# Altium PCB iris-fpc-set1.PcbDoc
Units mm, origin at the board's own origin, x right, y up, seen from the top; angles counter-clockwise.
Board outline 152.4 x 101.6 mm, 2 copper layers (Top Layer, Bottom Layer), stack 0.086 mm thick; 14 components, 46 nets, 124 pads, 0 vias.
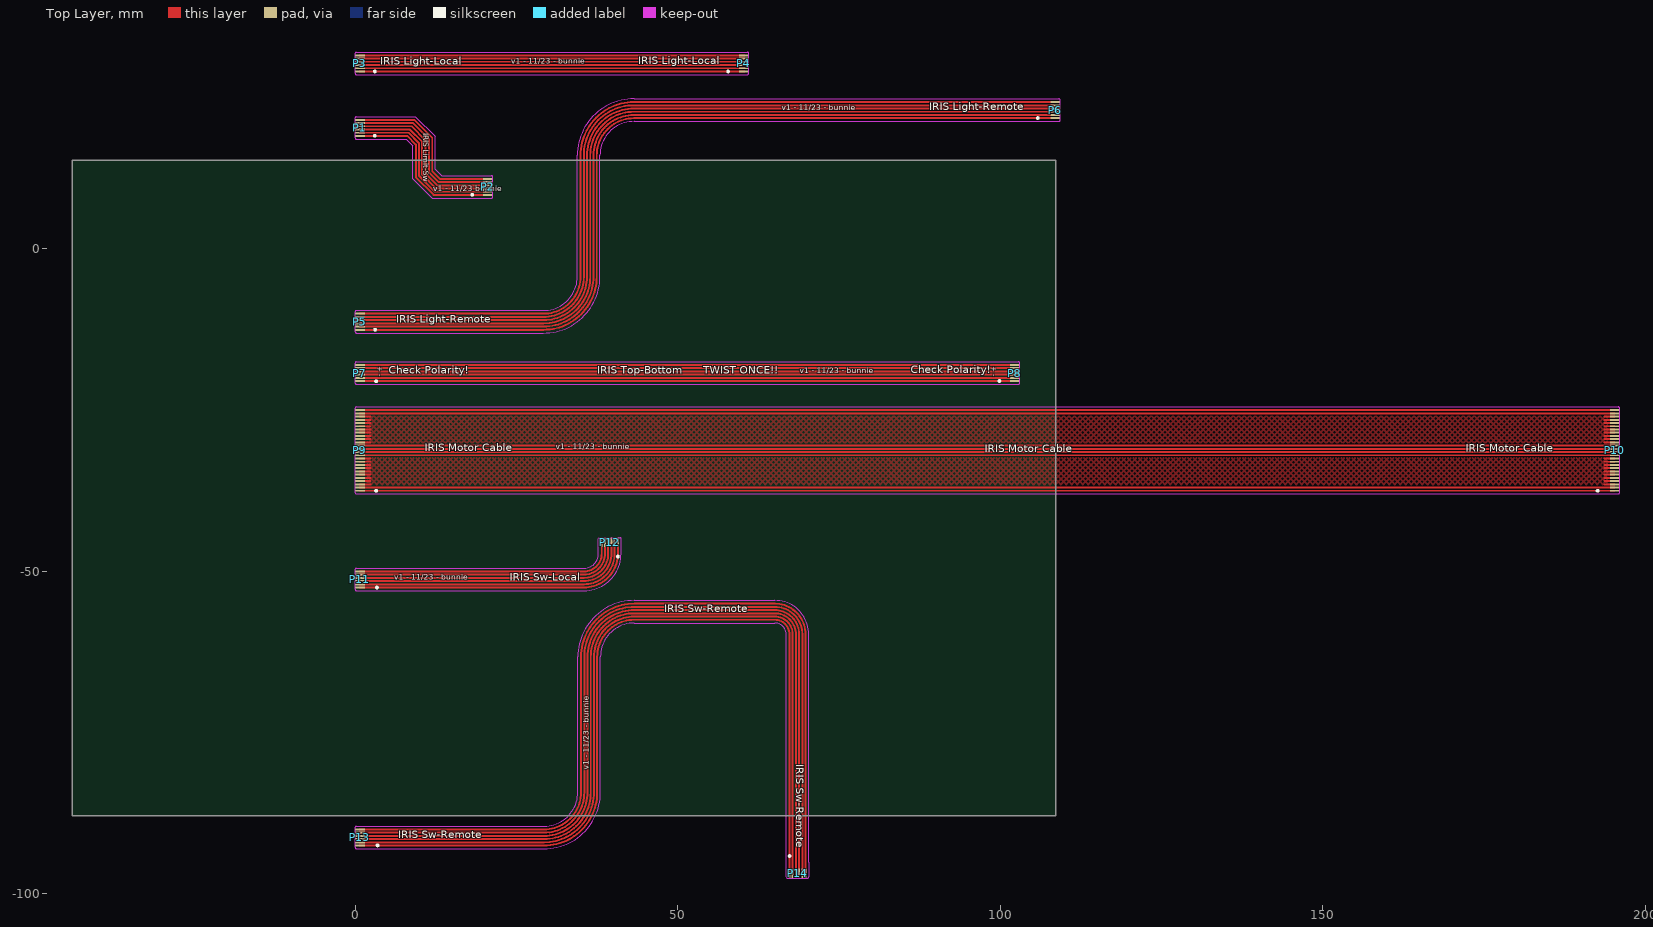
[diagram p0: Top Layer view]
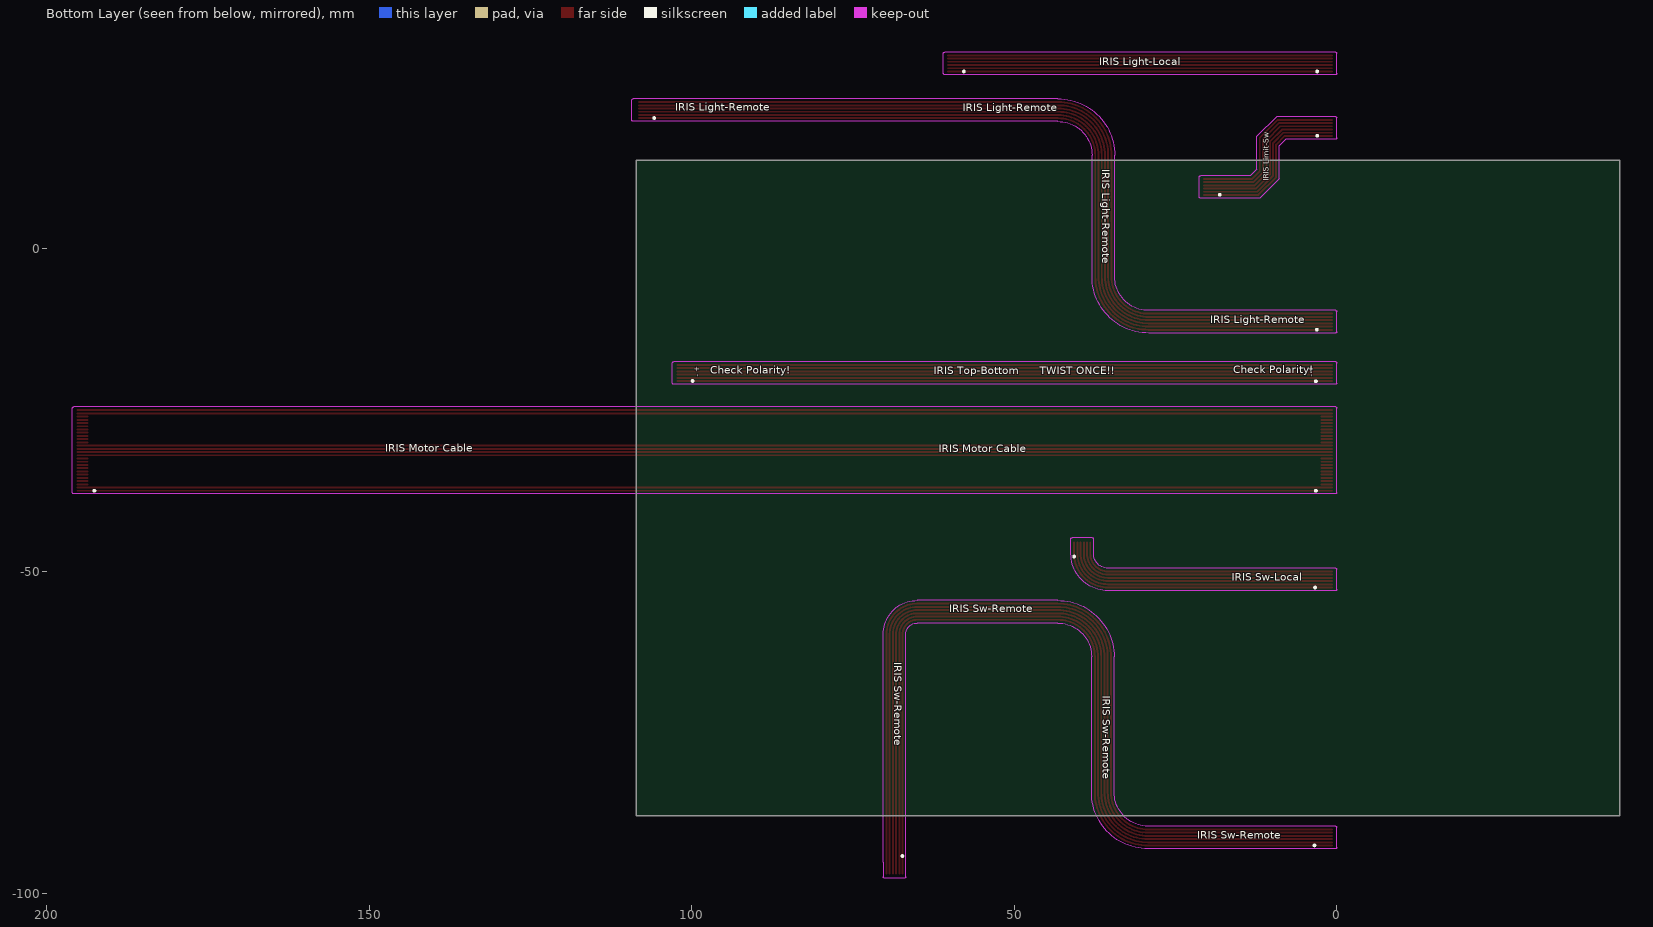
[diagram p1: Bottom Layer view, seen from below]

## Layer stack, top to bottom
Board Layer Stack Top Coverlay: solder mask 0.012, FC-001, Dk 4
Top Layer: signal copper 0.0356
Dielectric 1: dielectric 0.015, PI, Dk 4.8
Bottom Layer: signal copper 0.0356
Board Layer Stack Bottom Coverlay: solder mask 0.012, FC-001, Dk 4

## Board outline
-43.815,-87.884 108.585,-87.884 108.585,13.716 -43.815,13.716

## Design rules (kind name [scope] priority, off if disabled: settings)
Clearance [All] p1: gap=0.15 ignorepadtopadclearanceinfootprint=FALSE except(0: Arc-Hole Track-Hole SMDPad-Hole THPad-Hole Via-Hole Fill-Hole Poly-Hole Region-Hole Text-Hole)
PolygonConnect [All] p1: connectstyle=Relief reliefconductorwidth=0.254 reliefentries=4 polygonreliefangle="90 Angle" airgapwidth=0.254
RoutingVias [All] p1: holewidth=0.3 width=0.6 viastyle="Through Hole" minholewidth=0.3 minwidth=0.6 maxholewidth=0.3 maxwidth=0.6
SolderMaskExpansion [All] p1: expansion=0.102 istentingtop=FALSE
Width [All] p1: maxlimit=5 minlimit=0.15 preferedwidth=0.3
30 further rules are at their usual default settings.

## Components (designator, comment, footprint, x,y, rotation, side; value= is the part's Value field where it differs from the comment)
P1 "FH34 FPC end" FPC-06-0.5MMP-0.3T-2.5MMS 0,20 r90 top
P2 "FH34 FPC end" FPC-06-0.5MMP-0.3T-2.5MMS 21.325,8.35 r270 top
P3 "FH34 FPC end" FPC-06-0.5MMP-0.3T-2.5MMS 0,30 r90 top
P4 "FH34 FPC end" FPC-06-0.5MMP-0.3T-2.5MMS 61,27.5 r270 top
P5 "FH34 FPC end" FPC-06-0.5MMP-0.3T-2.5MMS 0,-10.05 r90 top
P6 "FH34 FPC end" FPC-06-0.5MMP-0.3T-2.5MMS 109.3,20.25 r270 top
P7 "FH34 FPC end" FPC-06-0.5MMP-0.3T-2.5MMS 0,-18 r90 top
P8 "FH34 FPC end" FPC-06-0.5MMP-0.3T-2.5MMS 103,-20.5 r270 top
P9 "26-pin FPC" FPC-26-0.5MMP-0.3T-2.5MMS 0,-25 r90 top
P10 "26-pin FPC" FPC-26-0.5MMP-0.3T-2.5MMS 196,-37.5 r270 top
P11 "FH34 FPC end" FPC-06-0.5MMP-0.3T-2.5MMS 0,-50 r90 top
P12 "FH34 FPC end" FPC-06-0.5MMP-0.3T-2.5MMS 40.725,-44.75 r0 top
P13 "FH34 FPC end" FPC-06-0.5MMP-0.3T-2.5MMS 0,-90 r90 top
P14 "FH34 FPC end" FPC-06-0.5MMP-0.3T-2.5MMS 67.325,-97.55 r180 top

## Footprints (in the part's own frame and the unit in brackets; to place one, negate y for a bottom-side part, rotate by r counter-clockwise, add the part's x,y. Pads: shape width x height; smd on the part's side, far side on the other; paste and mask are expansions set on the pad)
FPC-06-0.5MMP-0.3T-2.5MMS [mm] "FPC connector, 6 contact 0.5mm pitch, 0.3mm thick with 2.5mm stiffener (FH34)"
  rect 0.3x1.5 smd mask+0: 1(0,-0.75) 2(-0.5,-0.75) 3(-1,-0.75) 4(-1.5,-0.75) 5(-2,-0.75) 6(-2.5,-0.75)
  Keep-Out Layer lines w0.1: -3,-2.5 -3,-0.2 cw(c-2.8,-0.2) -2.8,0 0.3,0 cw(c0.3,-0.2) 0.5,-0.2 0.5,-2.5
FPC-26-0.5MMP-0.3T-2.5MMS [mm] "FPC connector, 26 contact 0.5mm pitch, 0.3mm thick with 2.5mm stiffener (FH34)"
  rect 0.3x1.5 smd mask+0: 1(0,-0.75) 2(-0.5,-0.75) 3(-1,-0.75) 4(-1.5,-0.75) 5(-2,-0.75) 6(-2.5,-0.75) 7(-3,-0.75) 8(-3.5,-0.75) 9(-4,-0.75) 10(-4.5,-0.75) 11(-5,-0.75) 12(-5.5,-0.75) 13(-6,-0.75) 14(-6.5,-0.75) 15(-7,-0.75) 16(-7.5,-0.75) 17(-8,-0.75) 18(-8.5,-0.75) 19(-9,-0.75) 20(-9.5,-0.75) 21(-10,-0.75) 22(-10.5,-0.75) 23(-11,-0.75) 24(-11.5,-0.75) 25(-12,-0.75) 26(-12.5,-0.75)
  Keep-Out Layer lines w0.1: -13,-2.5 -13,-0.2 cw(c-12.8,-0.2) -12.8,0 0.3,0 cw(c0.3,-0.2) 0.5,-0.2 0.5,-2.5

## Part data
P1 P2 P3 P4 P5 P6 P7 P8 P11 P12 P13 P14: library part "Header 6", "Header, 6-Pin", MPN=FH34SRJ-6S-0.5SH(50), LatestRevisionDate=17-Jul-2002, LatestRevisionNote="Re-released for DXP Platform.", MYPN=J-FH34SRJ-6S-0.5SH(50), Publisher="Altium Limited", VENDOR=HRS
P9 P10: library part FPC-26, "26 Pin FPC header", MPN=FH34SRJ-26S-0.5SH(99), MYPN=J-FPC-0.5mm-26-0.3mm-T/B, System=Connector, VENDOR=Hirose

## Nets (pads, with @x,y where several pads share a name; then routed paths per layer and width w, separated by ;. In a path a pad name is that pad's centre, name@x,y a point inside that pad or via, vN(x,y) a via of type N, cw(c..) or ccw(c..) an arc to the next point about the centre after c; other vN are vias at no path point)
light-local0: P3.6 P4.1 | length 59.5
  Top Layer w0.3: P3.6 P4.1
light-local1: P3.5 P4.2 | length 59.5
  Top Layer w0.3: P3.5 P4.2
light-local2: P3.4 P4.3 | length 59.5
  Top Layer w0.3: P3.4 P4.3
light-local3: P3.3 P4.4 | length 59.5
  Top Layer w0.3: P3.3 P4.4
light-local4: P3.2 P4.5 | length 59.5
  Top Layer w0.3: P3.2 P4.5
light-local5: P3.1 P4.6 | length 59.5
  Top Layer w0.3: P3.1 P4.6
light-remote0: P5.6 P6.1 | length 134.2
  Top Layer w0.3: P5.6 29.2,-12.55 ccw(c29.2,-4.3) 37.45,-4.3 37.45,14.5 cw(c43.2,14.5) 43.2,20.25 P6.1@108.2,20.25
light-remote1: P5.5 P6.2 | length 134.2
  Top Layer w0.3: P5.5 29.2,-12.05 ccw(c29.2,-4.3) 36.95,-4.3 36.95,14.5 cw(c43.2,14.5) 43.2,20.75 P6.2@108.2,20.75
light-remote2: P5.4 P6.3 | length 134.2
  Top Layer w0.3: P5.4 29.2,-11.55 ccw(c29.2,-4.3) 36.45,-4.3 36.45,14.5 cw(c43.2,14.5) 43.2,21.25 P6.3@108.2,21.25
light-remote3: P5.3 P6.4 | length 134.2
  Top Layer w0.3: P5.3 29.2,-11.05 ccw(c29.2,-4.3) 35.95,-4.3 35.95,14.5 cw(c43.2,14.5) 43.2,21.75 P6.4@108.2,21.75
light-remote4: P5.2 P6.5 | length 134.2
  Top Layer w0.3: P5.2 29.2,-10.55 ccw(c29.2,-4.3) 35.45,-4.3 35.45,14.5 cw(c43.2,14.5) 43.2,22.25 P6.5@108.2,22.25
light-remote5: P5.1 P6.6 | length 134.2
  Top Layer w0.3: P5.1 29.2,-10.05 ccw(c29.2,-4.3) 34.95,-4.3 34.95,14.5 cw(c43.2,14.5) 43.2,22.75 P6.6@108.2,22.75
limitsw0: P1.6 P2.1 | length 26.6
  Top Layer w0.3: P1.6 8.075,17.5 9.425,16.15 9.425,11.075 12.15,8.35 P2.1
limitsw1: P1.5 P2.2 | length 26.6
  Top Layer w0.3: P1.5 8.275,18 9.9,16.375 9.9,11.3 12.35,8.85 P2.2
limitsw2: P1.4 P2.3 | length 26.6
  Top Layer w0.3: P1.4 8.5,18.5 10.375,16.625 10.375,11.525 12.55,9.35 P2.3
limitsw3: P1.3 P2.4 | length 26.6
  Top Layer w0.3: P1.3 8.75,19 10.9,16.85 10.9,11.7 12.75,9.85 P2.4
limitsw4: P1.2 P2.5 | length 26.6
  Top Layer w0.3: P1.2 8.975,19.5 11.425,17.05 11.425,11.875 12.95,10.35 P2.5
limitsw5: P1.1 P2.6 | length 26.7
  Top Layer w0.3: P1.1 9.2,20 11.95,17.25 11.95,12.05 13.15,10.85 P2.6
m1_0: P9.26 P10.1 | length 194.5
  Top Layer w0.3: P9.26 192.975,-37.5 194.112,-37.5 P10.1
m1_1: P9.25 P10.2 | length 195.6
  Top Layer w0.3: P9.25 194.112,-37 ; 192.975,-37 P10.2
m1_2: P9.15 P10.12 | length 194.5
  Top Layer w0.3: P9.15 192.975,-32 194.112,-32 P10.12
m1_3: P9.14 P10.13 | length 194.5
  Top Layer w0.3: P9.14 192.975,-31.5 194.112,-31.5 P10.13
m1_4: P9.13 P10.14 | length 194.5
  Top Layer w0.3: P9.13 192.975,-31 194.112,-31 P10.14
m1_5: P9.12 P10.15 | length 195.6
  Top Layer w0.3: P9.12 192.975,-30.5 ; 194.112,-30.5 192.975,-30.5 ; P10.15 192.975,-30.5
m1_6: P9.2 P10.25 | length 195.6
  Top Layer w0.3: P9.2 194.112,-25.5 ; 192.975,-25.5 P10.25
m1_7: P9.1 P10.26 | length 194.5
  Top Layer w0.3: P9.1 192.975,-25 194.112,-25 P10.26
m1_tie0: P9.16 P9.17 P9.18 P9.19 P9.20 P9.21 P9.22 P9.23 P9.24 P10.3 P10.4 P10.5 P10.6 P10.7 P10.8 P10.9 P10.10 P10.11 | length 28.8
  Top Layer w0.3: P9.24 2.35,-36.5 ; P9.23 2.35,-36 ; P9.22 2.35,-35.5 ; P9.21 2.35,-35 ; P9.20 2.35,-34.5 ; P9.19 2.35,-34 ; P9.18 2.35,-33.5 ; P9.17 2.35,-33 ; P9.16 2.35,-32.5 ; 193.65,-36.5 P10.3 ; 193.65,-36 P10.4 ; 193.65,-35.5 P10.5 ; 193.65,-35 P10.6 ; 193.65,-34.5 P10.7 ; 193.65,-34 P10.8 ; 193.65,-33.5 P10.9 ; 193.65,-33 P10.10 ; 193.65,-32.5 P10.11
m1_tie1: P9.3 P9.4 P9.5 P9.6 P9.7 P9.8 P9.9 P9.10 P9.11 P10.16 P10.17 P10.18 P10.19 P10.20 P10.21 P10.22 P10.23 P10.24 | length 28.8
  Top Layer w0.3: P9.11 2.35,-30 ; P9.10 2.35,-29.5 ; P9.9 2.35,-29 ; P9.8 2.35,-28.5 ; P9.7 2.35,-28 ; P9.6 2.35,-27.5 ; P9.5 2.35,-27 ; P9.4 2.35,-26.5 ; P9.3 2.35,-26 ; 193.65,-30 P10.16 ; 193.65,-29.5 P10.17 ; 193.65,-29 P10.18 ; 193.65,-28.5 P10.19 ; 193.65,-28 P10.20 ; 193.65,-27.5 P10.21 ; 193.65,-27 P10.22 ; 193.65,-26.5 P10.23 ; 193.65,-26 P10.24
sw-local0: P11.6 P12.1 | length 44.7
  Top Layer w0.3: P11.6 35.475,-52.5 ccw(c35.475,-47.25) 40.725,-47.25 P12.1
sw-local1: P11.5 P12.2 | length 43.9
  Top Layer w0.3: P11.5 35.475,-52 ccw(c35.475,-47.25) 40.225,-47.25 P12.2
sw-local2: P11.4 P12.3 | length 43.2
  Top Layer w0.3: P11.4 35.475,-51.5 ccw(c35.475,-47.25) 39.725,-47.25 P12.3
sw-local3: P11.3 P12.4 | length 42.4
  Top Layer w0.3: P11.3 35.475,-51 ccw(c35.475,-47.25) 39.225,-47.25 P12.4
sw-local4: P11.2 P12.5 | length 41.6
  Top Layer w0.3: P11.2 35.475,-50.5 ccw(c35.475,-47.25) 38.725,-47.25 P12.5
sw-local5: P11.1 P12.6 | length 40.8
  Top Layer w0.3: P11.1 35.475,-50 ccw(c35.475,-47.25) 38.225,-47.25 P12.6
sw-remote0: P13.6 P14.1 | length 133.9
  Top Layer w0.3: P13.6 29.275,-92.5 ccw(c29.275,-84.25) 37.525,-84.25 37.525,-63.25 cw(c43.275,-63.25) 43.275,-57.5 65.075,-57.5 cw(c65.075,-59.75) 67.325,-59.75 P14.1
sw-remote1: P13.5 P14.2 | length 134.7
  Top Layer w0.3: P13.5 29.275,-92 ccw(c29.275,-84.25) 37.025,-84.25 37.025,-63.25 cw(c43.275,-63.25) 43.275,-57 65.075,-57 cw(c65.075,-59.75) 67.825,-59.75 P14.2
sw-remote2: P13.4 P14.3 | length 135.5
  Top Layer w0.3: P13.4 29.275,-91.5 ccw(c29.275,-84.25) 36.525,-84.25 36.525,-63.25 cw(c43.275,-63.25) 43.275,-56.5 65.075,-56.5 cw(c65.075,-59.75) 68.325,-59.75 P14.3
sw-remote3: P13.3 P14.4 | length 136.3
  Top Layer w0.3: P13.3 29.275,-91 ccw(c29.275,-84.25) 36.025,-84.25 36.025,-63.25 cw(c43.275,-63.25) 43.275,-56 65.075,-56 cw(c65.075,-59.75) 68.825,-59.75 P14.4
sw-remote4: P13.2 P14.5 | length 137
  Top Layer w0.3: P13.2 29.275,-90.5 ccw(c29.275,-84.25) 35.525,-84.25 35.525,-63.25 cw(c43.275,-63.25) 43.275,-55.5 65.075,-55.5 cw(c65.075,-59.75) 69.325,-59.75 P14.5
sw-remote5: P13.1 P14.6 | length 137.8
  Top Layer w0.3: P13.1 29.275,-90 ccw(c29.275,-84.25) 35.025,-84.25 35.025,-63.25 cw(c43.275,-63.25) 43.275,-55 65.075,-55 cw(c65.075,-59.75) 69.825,-59.75 P14.6
top-bot0: P7.6 P8.1 | length 101.5
  Top Layer w0.3: P7.6 P8.1
top-bot1: P7.5 P8.2 | length 101.5
  Top Layer w0.3: P7.5 P8.2
top-bot2: P7.4 P8.3 | length 101.5
  Top Layer w0.3: P7.4 P8.3
top-bot3: P7.3 P8.4 | length 101.5
  Top Layer w0.3: P7.3 P8.4
top-bot4: P7.2 P8.5 | length 101.5
  Top Layer w0.3: P7.2 P8.5
top-bot5: P7.1 P8.6 | length 101.5
  Top Layer w0.3: P7.1 P8.6

## Polygon pours and split planes (outlines as drawn)
m1_tie1 on Top Layer "M1_TIE1_L01_P001" (hatched 45Degree grid 0.6 track 0.3, remove dead copper, pour order 1): 1.875,-30.725 1.875,-24.475 194.4,-24.475 194.4,-30.65
m1_tie0 on Top Layer "M1_TIE0_L01_P000" (hatched 45Degree grid 0.6 track 0.3, remove dead copper, pour order 0): 1.875,-38 1.875,-31.75 194.4,-31.75 194.4,-37.925

## Keep-outs
Keep-Out Layer:
  lines w0.1: 2.5,-93 29.275,-93 ccw(c29.275,-84.25) 38.025,-84.25 38.025,-63.25 cw(c43.275,-63.25) 43.275,-58 65.075,-58 cw(c65.075,-59.75) 66.825,-59.75 66.825,-95.05 ; 2.5,-89.5 29.275,-89.5 ccw(c29.275,-84.25) 34.525,-84.25 34.525,-63.25 cw(c43.275,-63.25) 43.275,-54.5 65.075,-54.5 cw(c65.075,-59.75) 70.325,-59.75 70.325,-95.05 ; 2.5,-53 35.475,-53 ccw(c35.475,-47.25) 41.225,-47.25 ; 2.5,-49.5 35.475,-49.5 ccw(c35.475,-47.25) 37.725,-47.25 ; 2.5,-38 193.5,-38 ; 2.5,-24.5 193.5,-24.5 ; 2.5,-21 100.5,-21 ; 2.5,-17.5 100.5,-17.5 ; 2.5,-13.05 29.15,-13.05 ccw(c29.2,-4.3) 37.95,-4.3 37.95,14.5 cw(c43.2,14.5) 43.25,19.75 106.8,19.75 ; 2.5,-9.55 29.15,-9.55 ccw(c29.2,-4.3) 34.45,-4.3 34.45,14.5 ; 2.5,17 7.9,17 8.9,16 8.9,10.875 11.925,7.85 18.825,7.85 ; 2.5,20.5 9.35,20.5 12.4,17.45 12.4,12.344 ; 2.5,27 58.5,27 ; 2.5,30.5 58.5,30.5 ; 12.398,12.35 13.398,11.35 18.825,11.35 ; 106.8,23.25 43.25,23.25 ccw(c43.2,14.5) 34.45,14.5 ; 34.45,14.5 34.45,14.5

## Silkscreen, mask and mechanical layers (free items; w line width, h text height)
Top Overlay:
  circle w0.3: c67.35,-94.125 r0.141
  circle w0.3: c3.475,-92.475 r0.141
  circle w0.3: c40.725,-47.7 r0.141
  circle w0.3: c3.375,-52.5 r0.141
  circle w0.3: c192.6,-37.5 r0.141
  circle w0.3: c3.25,-37.5 r0.141
  circle w0.3: c99.875,-20.475 r0.141
  circle w0.3: c3.25,-20.525 r0.141
  circle w0.3: c105.825,20.275 r0.141
  circle w0.3: c3.1,-12.525 r0.141
  circle w0.3: c18.15,8.375 r0.141
  circle w0.3: c3.025,17.525 r0.141
  circle w0.3: c57.825,27.5 r0.141
  circle w0.3: c3.05,27.5 r0.141
  text "v1 - 11/23 - bunnie" at 24.175,28.42 h1.5
  text "IRIS Light-Local" at 43.9,28.211 h2
  text "IRIS Light-Local" at 3.875,28.161 h2
  text "v1 - 11/23 - bunnie" at 66.125,21.17 h1.5
  text "IRIS Light-Remote" at 89.025,21.136 h2
  text "IRIS Limit-Sw" at 10.214,17.9 h1.5 r270
  text "v1 - 11/23 bunnie" at 12.075,8.625 h1.5
  text "IRIS Light-Remote" at 6.35,-11.839 h2
  text "+ -" at 3.475,-18.175 h0.8 r270
  text "+ -" at 98.7,-18.175 h0.8 r270
  text "v1 - 11/23 - bunnie" at 68.9,-19.63 h1.5
  text "Check Polarity!" at 86.101,-19.688 h2
  text "Check Polarity!" at 5.201,-19.738 h2
  text "IRIS Top-Bottom      TWIST ONCE!!" at 37.5,-19.757 h2
  text "v1 - 11/23 - bunnie" at 31.075,-31.405 h1.5
  text "IRIS Motor Cable" at 10.825,-31.781 h2
  text "IRIS Motor Cable" at 172.125,-31.806 h2
  text "IRIS Motor Cable" at 97.575,-31.906 h2
  text "v1 - 11/23 - bunnie" at 6.05,-51.63 h1.5
  text "IRIS Sw-Local" at 23.975,-51.832 h2
  text "IRIS Sw-Remote" at 47.925,-56.731 h2
  text "IRIS Sw-Remote" at 67.994,-79.9 h2 r270
  text "v1 - 11/23 - bunnie" at 36.505,-80.725 h1.5 r90
  text "IRIS Sw-Remote" at 6.675,-91.756 h2
Bottom Overlay:
  circle w0.3: c67.35,-94.125 r0.141
  circle w0.3: c3.475,-92.475 r0.141
  circle w0.3: c40.725,-47.7 r0.141
  circle w0.3: c3.375,-52.5 r0.141
  circle w0.3: c192.6,-37.5 r0.141
  circle w0.3: c3.25,-37.5 r0.141
  circle w0.3: c99.875,-20.475 r0.141
  circle w0.3: c3.25,-20.525 r0.141
  circle w0.3: c105.825,20.275 r0.141
  circle w0.3: c3.1,-12.525 r0.141
  circle w0.3: c18.15,8.375 r0.141
  circle w0.3: c3.025,17.525 r0.141
  circle w0.3: c57.825,27.5 r0.141
  circle w0.3: c3.05,27.5 r0.141
  text "IRIS Light-Local" at 36.85,28.111 h2
  text "IRIS Light-Remote" at 102.55,21.036 h2
  text "IRIS Light-Remote" at 58.025,20.911 h2
  text "IRIS Light-Remote" at 36.789,12.375 h2 r90
  text "IRIS Limit-Sw" at 10.264,10.525 h1.5 r270
  text "IRIS Light-Remote" at 19.65,-11.914 h2
  text "+ -" at 3.625,-18.175 h0.8 r270
  text "+ -" at 98.85,-18.175 h0.8 r270
  text "Check Polarity!" at 16.024,-19.688 h2
  text "Check Polarity!" at 97.124,-19.738 h2
  text "IRIS Top-Bottom      TWIST ONCE!!" at 62.5,-19.832 h2
  text "IRIS Motor Cable" at 147.55,-31.806 h2
  text "IRIS Motor Cable" at 61.725,-31.906 h2
  text "IRIS Sw-Local" at 16.275,-51.832 h2
  text "IRIS Sw-Remote" at 60.1,-56.756 h2
  text "IRIS Sw-Remote" at 69.006,-64.1 h2 r90
  text "IRIS Sw-Remote" at 36.706,-69.275 h2 r90
  text "IRIS Sw-Remote" at 21.65,-91.831 h2
Mechanical 2:
  lines w0.381: 73.365,-6.937 83.777,-6.937 136.086,-6.937 150.306,-6.937 166.812,-6.937 181.286,-6.937 ; 73.365,-3.889 83.777,-3.889 136.086,-3.889 150.306,-3.889 166.812,-3.889 181.286,-3.889 ; 73.365,-0.841 83.777,-0.841 136.086,-0.841 150.306,-0.841 166.812,-0.841 181.286,-0.841 ; 73.365,2.207 83.777,2.207 136.086,2.207 150.306,2.207 166.812,2.207 181.286,2.207 ; 73.365,5.255 83.777,5.255 136.086,5.255 150.306,5.255 166.812,5.255 181.286,5.255 ; 73.365,8.303 83.777,8.303 136.086,8.303 150.306,8.303 166.812,8.303 181.286,8.303 ; 73.365,11.351 181.286,11.351 ; 83.777,14.399 83.777,-9.985 ; 136.086,14.399 136.086,-9.985 ; 150.306,14.399 150.306,-9.985 ; 166.812,14.399 166.812,-9.985 ; 83.777,-9.985 136.086,-9.985 ; 83.777,-9.985 73.365,-9.985 73.365,14.399 181.286,14.399 181.286,-9.985 166.812,-9.985 ; 136.086,-9.985 150.306,-9.985 ; 150.306,-9.985 166.812,-9.985
  text "OK to substitute for standard 1-sided FPC stack with stiffener" at 93,15.675 h1.5
  text "Layer" at 75.143,12.113 h1.52
  text "Name" at 85.555,12.113 h1.52
  text "Material" at 137.864,12.113 h1.52
  text "Thickness" at 152.084,12.113 h1.52
  text "Constant" at 168.59,12.113 h1.52
  text "Top Overlay" at 85.555,9.065 h1.52
  text "Board Layer Stack Top Coverlay" at 85.555,6.017 h1.52
  text "FC-001" at 137.864,6.017 h1.52
  text "0.012mm" at 152.084,6.017 h1.52
  text "4" at 168.59,6.017 h1.52
  text "1" at 75.143,2.969 h1.52
  text "Top Layer" at 85.555,2.969 h1.52
  text "0.036mm" at 152.084,2.969 h1.52
  text "Dielectric 1" at 85.555,-0.079 h1.52
  text "PI" at 137.864,-0.079 h1.52
  text "0.015mm" at 152.084,-0.079 h1.52
  text "4.8" at 168.59,-0.079 h1.52
  text "2" at 75.143,-3.127 h1.52
  text "Bottom Layer" at 85.555,-3.127 h1.52
  text "0.036mm" at 152.084,-3.127 h1.52
  text "Board Layer Stack Bottom Coverlay" at 85.555,-6.175 h1.52
  text "FC-001" at 137.864,-6.175 h1.52
  text "0.012mm" at 152.084,-6.175 h1.52
  text "4" at 168.59,-6.175 h1.52
  text "Bottom Overlay" at 85.555,-9.223 h1.52
  text "Total board thickness:" at 75.143,-12.271 h1.52
  text "0.110mm" at 152.084,-12.271 h1.52
  text "(non-stiffener area)" at 110.35,-12.4 h1.5
  text "Please panelize boards to optimize cost" at 75.375,-15 h1.5
Mechanical 4:
  lines w0.1: -0.025,-91.25 29.275,-91.25 ccw(c29.275,-84.25) 36.275,-84.25 36.275,-63.25 cw(c43.275,-63.25) 43.275,-56.25 65.075,-56.25 cw(c65.075,-59.75) 68.575,-59.75 68.575,-97.55 ; -0.025,-51.25 35.475,-51.25 ccw(c35.475,-47.25) 39.475,-47.25 39.475,-44.75 ; -0.025,18.75 10.65,18.75 10.65,9.6 21.325,9.6 ; 0,-11.3 29.2,-11.3 ccw(c29.2,-4.3) 36.2,-4.3 36.2,14.5 ; 8.413,16.513 10.887,18.987 ; 8.9,13.825 12.4,13.825 ; 10.413,9.363 12.887,11.837 ; 27.5,-84.25 31.3,-84.25 ; 27.8,-4.3 36.8,-4.3 ; 29.2,-10.7 29.2,-3.7 ; 29.275,-91.4 29.275,-82.975 ; 35.075,-47.25 35.975,-47.25 ; 35.475,-49.3 35.475,-46.85 ; 36.125,-63.25 44.275,-63.25 ; 43.2,13 43.2,21.35 ; 43.275,-63.575 43.275,-56.1 ; 44.15,14.5 36.2,14.5 ; 58.3,21.9 58.3,23.3 ; 65.075,-60.475 65.075,-56.1 ; 109.3,21.5 58.3,21.5 43.2,21.5 ccw(c43.2,14.5) 36.2,14.5
  text "bend point" at 56.8,24.467 h0.5

## Dimensions
68.575,-59.75 to 68.575,-97.55 on Mechanical 4
43.275,-56.25 to 65.075,-56.25 on Mechanical 4
36.275,-84.25 to 36.275,-63.25 on Mechanical 4
-0.025,-91.25 to 29.275,-91.25 on Mechanical 4
-0.025,-51.25 to 35.475,-49.3 on Mechanical 4
0,-24.7 to 196,-24.7 on Mechanical 4
36.2,14.5 to 43.2,21.5 on Mechanical 4
29.2,-11.3 to 36.2,-4.3 on Mechanical 4
43.2,21.5 to 58.3,21.5 on Mechanical 4
36.2,-4.3 to 36.2,14.5 on Mechanical 4
0,-11.3 to 29.2,-11.3 on Mechanical 4
58.3,21.9 to 109.3,21.5 on Mechanical 4
10.65,9.6 to 10.65,18.75 on Mechanical 4
10.65,18.75 to -0.025,18.75 on Mechanical 4

## Text inside footprints (layer, text, board x,y; h text height)
P1: Mechanical 2 "PI stiffiner to 0.3mm  / +/-0.03mm total thickness / without coverlay" at -1.15,15.6 h0.25 r90
P2: Mechanical 2 "PI stiffiner to 0.3mm  / +/-0.03mm total thickness / without coverlay" at 22.475,12.75 h0.25 r270
P3: Mechanical 2 "PI stiffiner to 0.3mm  / +/-0.03mm total thickness / without coverlay" at -1.15,25.6 h0.25 r90
P4: Mechanical 2 "PI stiffiner to 0.3mm  / +/-0.03mm total thickness / without coverlay" at 62.15,31.9 h0.25 r270
P5: Mechanical 2 "PI stiffiner to 0.3mm  / +/-0.03mm total thickness / without coverlay" at -1.15,-14.45 h0.25 r90
P6: Mechanical 2 "PI stiffiner to 0.3mm  / +/-0.03mm total thickness / without coverlay" at 110.45,24.65 h0.25 r270
P7: Mechanical 2 "PI stiffiner to 0.3mm  / +/-0.03mm total thickness / without coverlay" at -1.15,-22.4 h0.25 r90
P8: Mechanical 2 "PI stiffiner to 0.3mm  / +/-0.03mm total thickness / without coverlay" at 104.15,-16.1 h0.25 r270
P9: Mechanical 2 "PI stiffiner to 0.3mm  / +/-0.03mm total thickness / without coverlay" at -1.1,-34.9 h0.25 r90
P10: Mechanical 2 "PI stiffiner to 0.3mm  / +/-0.03mm total thickness / without coverlay" at 197.1,-27.6 h0.25 r270
P11: Mechanical 2 "PI stiffiner to 0.3mm  / +/-0.03mm total thickness / without coverlay" at -1.15,-54.4 h0.25 r90
P12: Mechanical 2 "PI stiffiner to 0.3mm  / +/-0.03mm total thickness / without coverlay" at 36.325,-43.6 h0.25
P13: Mechanical 2 "PI stiffiner to 0.3mm  / +/-0.03mm total thickness / without coverlay" at -1.15,-94.4 h0.25 r90
P14: Mechanical 2 "PI stiffiner to 0.3mm  / +/-0.03mm total thickness / without coverlay" at 71.725,-98.7 h0.25 r180